# Altium PCB PCB1.PcbDoc (part 2 of 6)
Units mm, origin at the board's own origin, x right, y up, seen from the top; angles counter-clockwise.
Board outline 1473.2 x 504.06 mm, 4 copper layers (Top Layer, MidLayer1, MidLayer2, Bottom Layer); 162 components, 222 nets, 4894 pads, 2213 vias.
Unrouted connection lines stored in the file: 216.
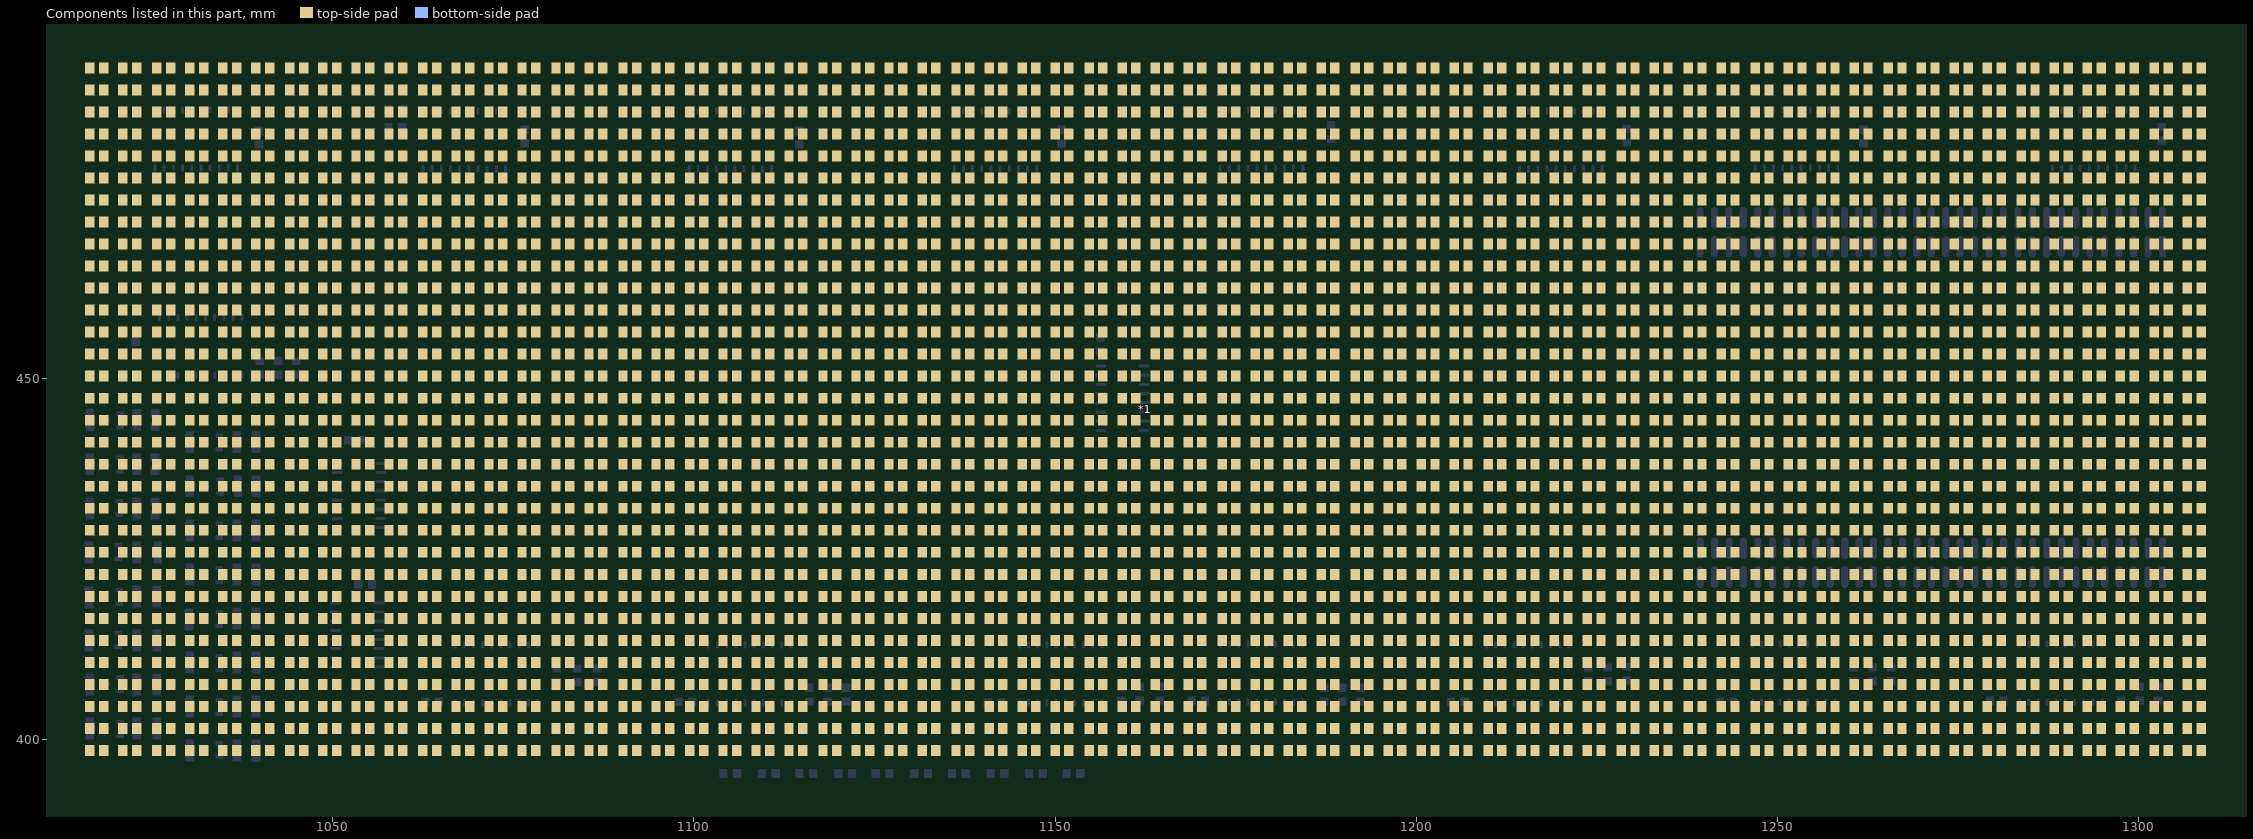
[diagram p4: the components of this part, seen from the top]

## Footprints (in the part's own frame and the unit in brackets; to place one, negate y for a bottom-side part, rotate by r counter-clockwise, add the part's x,y. Pads: shape width x height; smd on the part's side, far side on the other; paste and mask are expansions set on the pad) (continued)
LED_3264 [mm] (continued)
  rect 1.3x1.5 smd: 1(-275.082,-94.869) 1(-275.082,-91.821) 1(-275.082,-88.773) 1(-275.082,-85.725) 1(-275.082,-82.677) 1(-275.082,-79.629) 1(-275.082,-76.581) 1(-275.082,-73.533) 1(-275.082,-70.485) 1(-275.082,-67.437) 1(-275.082,-64.389) 1(-275.082,-61.341) 1(-275.082,-58.293) 1(-275.082,-55.245) 1(-275.082,-52.197) 1(-275.082,-49.149) 2(-270.51,-94.869) 2(-270.51,-91.821) 2(-270.51,-88.773) 2(-270.51,-85.725) 2(-270.51,-82.677) 2(-270.51,-79.629) 2(-270.51,-76.581) 2(-270.51,-73.533) 2(-270.51,-70.485) 2(-270.51,-67.437) 2(-270.51,-64.389) 2(-270.51,-61.341) 2(-270.51,-58.293) 2(-270.51,-55.245) 2(-270.51,-52.197) 2(-270.51,-49.149) 3(-265.811,-94.869) 3(-265.811,-91.821) 3(-265.811,-88.773) 3(-265.811,-85.725) 3(-265.811,-82.677) 3(-265.811,-79.629) 3(-265.811,-76.581) 3(-265.811,-73.533) 3(-265.811,-70.485) 3(-265.811,-67.437) 3(-265.811,-64.389) 3(-265.811,-61.341) 3(-265.811,-58.293) 3(-265.811,-55.245) 3(-265.811,-52.197) 3(-265.811,-49.149) 4(-261.239,-94.869) 4(-261.239,-91.821) 4(-261.239,-88.773) 4(-261.239,-85.725) 4(-261.239,-82.677) 4(-261.239,-79.629) 4(-261.239,-76.581) 4(-261.239,-73.533) 4(-261.239,-70.485) 4(-261.239,-67.437) 4(-261.239,-64.389) 4(-261.239,-61.341) 4(-261.239,-58.293) 4(-261.239,-55.245) 4(-261.239,-52.197) 4(-261.239,-49.149) 5(-256.667,-94.869) 5(-256.667,-91.821) 5(-256.667,-88.773) 5(-256.667,-85.725) 5(-256.667,-82.677) 5(-256.667,-79.629) 5(-256.667,-76.581) 5(-256.667,-73.533) 5(-256.667,-70.485) 5(-256.667,-67.437) 5(-256.667,-64.389) 5(-256.667,-61.341) 5(-256.667,-58.293) 5(-256.667,-55.245) 5(-256.667,-52.197) 5(-256.667,-49.149) 6(-252.095,-94.869) 6(-252.095,-91.821) 6(-252.095,-88.773) 6(-252.095,-85.725) 6(-252.095,-82.677) 6(-252.095,-79.629) 6(-252.095,-76.581) 6(-252.095,-73.533) 6(-252.095,-70.485) 6(-252.095,-67.437) 6(-252.095,-64.389) 6(-252.095,-61.341) 6(-252.095,-58.293) 6(-252.095,-55.245) 6(-252.095,-52.197) 6(-252.095,-49.149) 7(-247.396,-94.869) 7(-247.396,-91.821) 7(-247.396,-88.773) 7(-247.396,-85.725) 7(-247.396,-82.677) 7(-247.396,-79.629) 7(-247.396,-76.581) 7(-247.396,-73.533) 7(-247.396,-70.485) 7(-247.396,-67.437) 7(-247.396,-64.389) 7(-247.396,-61.341) 7(-247.396,-58.293) 7(-247.396,-55.245) 7(-247.396,-52.197) 7(-247.396,-49.149) 8(-242.824,-94.869) 8(-242.824,-91.821) 8(-242.824,-88.773) 8(-242.824,-85.725) 8(-242.824,-82.677) 8(-242.824,-79.629) 8(-242.824,-76.581) 8(-242.824,-73.533) 8(-242.824,-70.485) 8(-242.824,-67.437) 8(-242.824,-64.389) 8(-242.824,-61.341) 8(-242.824,-58.293) 8(-242.824,-55.245) 8(-242.824,-52.197) 8(-242.824,-49.149) 9(-238.252,-94.869) 9(-238.252,-91.821) 9(-238.252,-88.773) 9(-238.252,-85.725) 9(-238.252,-82.677) 9(-238.252,-79.629) 9(-238.252,-76.581) 9(-238.252,-73.533) 9(-238.252,-70.485) 9(-238.252,-67.437) 9(-238.252,-64.389) 9(-238.252,-61.341) 9(-238.252,-58.293) 9(-238.252,-55.245) 9(-238.252,-52.197) 9(-238.252,-49.149) 10(-233.68,-94.869) 10(-233.68,-91.821) 10(-233.68,-88.773) 10(-233.68,-85.725) 10(-233.68,-82.677) 10(-233.68,-79.629) 10(-233.68,-76.581) 10(-233.68,-73.533) 10(-233.68,-70.485) 10(-233.68,-67.437) 10(-233.68,-64.389) 10(-233.68,-61.341) 10(-233.68,-58.293) 10(-233.68,-55.245) 10(-233.68,-52.197) 10(-233.68,-49.149) 11(-228.981,-94.869) 11(-228.981,-91.821) 11(-228.981,-88.773) 11(-228.981,-85.725) 11(-228.981,-82.677) 11(-228.981,-79.629) 11(-228.981,-76.581) 11(-228.981,-73.533) 11(-228.981,-70.485) 11(-228.981,-67.437) 11(-228.981,-64.389) 11(-228.981,-61.341) 11(-228.981,-58.293) 11(-228.981,-55.245) 11(-228.981,-52.197) 11(-228.981,-49.149) 12(-224.409,-94.869) 12(-224.409,-91.821) 12(-224.409,-88.773) 12(-224.409,-85.725) 12(-224.409,-82.677) 12(-224.409,-79.629) 12(-224.409,-76.581) 12(-224.409,-73.533) 12(-224.409,-70.485) 12(-224.409,-67.437) 12(-224.409,-64.389) 12(-224.409,-61.341) 12(-224.409,-58.293) 12(-224.409,-55.245) 12(-224.409,-52.197) 12(-224.409,-49.149) 13(-219.837,-94.869) 13(-219.837,-91.821) 13(-219.837,-88.773) 13(-219.837,-85.725) 13(-219.837,-82.677) 13(-219.837,-79.629) 13(-219.837,-76.581) 13(-219.837,-73.533) 13(-219.837,-70.485) 13(-219.837,-67.437) 13(-219.837,-64.389) 13(-219.837,-61.341) 13(-219.837,-58.293) 13(-219.837,-55.245) 13(-219.837,-52.197) 13(-219.837,-49.149) 14(-215.265,-94.869) 14(-215.265,-91.821) 14(-215.265,-88.773) 14(-215.265,-85.725) 14(-215.265,-82.677) 14(-215.265,-79.629) 14(-215.265,-76.581) 14(-215.265,-73.533) 14(-215.265,-70.485) 14(-215.265,-67.437) 14(-215.265,-64.389) 14(-215.265,-61.341) 14(-215.265,-58.293) 14(-215.265,-55.245) 14(-215.265,-52.197) 14(-215.265,-49.149) 15(-210.566,-94.869) 15(-210.566,-91.821) 15(-210.566,-88.773) 15(-210.566,-85.725) 15(-210.566,-82.677) 15(-210.566,-79.629) 15(-210.566,-76.581) 15(-210.566,-73.533) 15(-210.566,-70.485) 15(-210.566,-67.437) 15(-210.566,-64.389) 15(-210.566,-61.341) 15(-210.566,-58.293) 15(-210.566,-55.245) 15(-210.566,-52.197) 15(-210.566,-49.149) 16(-205.994,-94.869) 16(-205.994,-91.821) 16(-205.994,-88.773) 16(-205.994,-85.725) 16(-205.994,-82.677) 16(-205.994,-79.629) 16(-205.994,-76.581) 16(-205.994,-73.533) 16(-205.994,-70.485) 16(-205.994,-67.437) 16(-205.994,-64.389) 16(-205.994,-61.341) 16(-205.994,-58.293) 16(-205.994,-55.245) 16(-205.994,-52.197) 16(-205.994,-49.149) 17(-201.295,-94.869) 17(-201.295,-91.821) 17(-201.295,-88.773) 17(-201.295,-85.725) 17(-201.295,-82.677) 17(-201.295,-79.629) 17(-201.295,-76.581) 17(-201.295,-73.533) 17(-201.295,-70.485) 17(-201.295,-67.437) 17(-201.295,-64.389) 17(-201.295,-61.341) 17(-201.295,-58.293) 17(-201.295,-55.245) 17(-201.295,-52.197) 17(-201.295,-49.149) 18(-196.723,-94.869) 18(-196.723,-91.821) 18(-196.723,-88.773) 18(-196.723,-85.725) 18(-196.723,-82.677) 18(-196.723,-79.629) 18(-196.723,-76.581) 18(-196.723,-73.533) 18(-196.723,-70.485) 18(-196.723,-67.437) 18(-196.723,-64.389) 18(-196.723,-61.341) 18(-196.723,-58.293) 18(-196.723,-55.245) 18(-196.723,-52.197) 18(-196.723,-49.149) 19(-192.024,-94.869) 19(-192.024,-91.821) 19(-192.024,-88.773) 19(-192.024,-85.725) 19(-192.024,-82.677) 19(-192.024,-79.629) 19(-192.024,-76.581) 19(-192.024,-73.533) 19(-192.024,-70.485) 19(-192.024,-67.437) 19(-192.024,-64.389) 19(-192.024,-61.341) 19(-192.024,-58.293) 19(-192.024,-55.245) 19(-192.024,-52.197) 19(-192.024,-49.149) 20(-187.452,-94.869) 20(-187.452,-91.821) 20(-187.452,-88.773) 20(-187.452,-85.725) 20(-187.452,-82.677) 20(-187.452,-79.629) 20(-187.452,-76.581) 20(-187.452,-73.533) 20(-187.452,-70.485) 20(-187.452,-67.437) 20(-187.452,-64.389) 20(-187.452,-61.341) 20(-187.452,-58.293) 20(-187.452,-55.245) 20(-187.452,-52.197) 20(-187.452,-49.149) 21(-182.88,-94.869) 21(-182.88,-91.821) 21(-182.88,-88.773) 21(-182.88,-85.725) 21(-182.88,-82.677) 21(-182.88,-79.629) 21(-182.88,-76.581) 21(-182.88,-73.533) 21(-182.88,-70.485) 21(-182.88,-67.437) 21(-182.88,-64.389) 21(-182.88,-61.341) 21(-182.88,-58.293) 21(-182.88,-55.245) 21(-182.88,-52.197) 21(-182.88,-49.149) 22(-178.308,-94.869) 22(-178.308,-91.821) 22(-178.308,-88.773) 22(-178.308,-85.725) 22(-178.308,-82.677) 22(-178.308,-79.629) 22(-178.308,-76.581) 22(-178.308,-73.533) 22(-178.308,-70.485) 22(-178.308,-67.437) 22(-178.308,-64.389) 22(-178.308,-61.341) 22(-178.308,-58.293) 22(-178.308,-55.245) 22(-178.308,-52.197) 22(-178.308,-49.149) 23(-173.609,-94.869) 23(-173.609,-91.821) 23(-173.609,-88.773) 23(-173.609,-85.725) 23(-173.609,-82.677) 23(-173.609,-79.629) 23(-173.609,-76.581) 23(-173.609,-73.533) 23(-173.609,-70.485) 23(-173.609,-67.437) 23(-173.609,-64.389) 23(-173.609,-61.341) 23(-173.609,-58.293) 23(-173.609,-55.245) 23(-173.609,-52.197) 23(-173.609,-49.149) 24(-169.037,-94.869) 24(-169.037,-91.821) 24(-169.037,-88.773) 24(-169.037,-85.725) 24(-169.037,-82.677) 24(-169.037,-79.629) 24(-169.037,-76.581) 24(-169.037,-73.533) 24(-169.037,-70.485) 24(-169.037,-67.437) 24(-169.037,-64.389) 24(-169.037,-61.341) 24(-169.037,-58.293) 24(-169.037,-55.245) 24(-169.037,-52.197) 24(-169.037,-49.149) 25(-164.465,-94.869) 25(-164.465,-91.821) 25(-164.465,-88.773) 25(-164.465,-85.725) 25(-164.465,-82.677) 25(-164.465,-79.629) 25(-164.465,-76.581) 25(-164.465,-73.533) 25(-164.465,-70.485) 25(-164.465,-67.437) 25(-164.465,-64.389) 25(-164.465,-61.341) 25(-164.465,-58.293) 25(-164.465,-55.245) 25(-164.465,-52.197) 25(-164.465,-49.149) 26(-159.893,-94.869) 26(-159.893,-91.821) 26(-159.893,-88.773) 26(-159.893,-85.725) 26(-159.893,-82.677) 26(-159.893,-79.629) 26(-159.893,-76.581) 26(-159.893,-73.533) 26(-159.893,-70.485) 26(-159.893,-67.437) 26(-159.893,-64.389) 26(-159.893,-61.341) 26(-159.893,-58.293) 26(-159.893,-55.245) 26(-159.893,-52.197) 26(-159.893,-49.149) 27(-155.194,-94.869) 27(-155.194,-91.821) 27(-155.194,-88.773) 27(-155.194,-85.725) 27(-155.194,-82.677) 27(-155.194,-79.629) 27(-155.194,-76.581) 27(-155.194,-73.533) 27(-155.194,-70.485) 27(-155.194,-67.437) 27(-155.194,-64.389) 27(-155.194,-61.341) 27(-155.194,-58.293) 27(-155.194,-55.245) 27(-155.194,-52.197) 27(-155.194,-49.149) 28(-150.622,-94.869) 28(-150.622,-91.821) 28(-150.622,-88.773) 28(-150.622,-85.725) 28(-150.622,-82.677) 28(-150.622,-79.629) 28(-150.622,-76.581) 28(-150.622,-73.533) 28(-150.622,-70.485) 28(-150.622,-67.437) 28(-150.622,-64.389) 28(-150.622,-61.341) 28(-150.622,-58.293) 28(-150.622,-55.245) 28(-150.622,-52.197) 28(-150.622,-49.149) 29(-146.05,-94.869) 29(-146.05,-91.821) 29(-146.05,-88.773) 29(-146.05,-85.725) 29(-146.05,-82.677) 29(-146.05,-79.629) 29(-146.05,-76.581) 29(-146.05,-73.533) 29(-146.05,-70.485) 29(-146.05,-67.437) 29(-146.05,-64.389) 29(-146.05,-61.341) 29(-146.05,-58.293) 29(-146.05,-55.245) 29(-146.05,-52.197) 29(-146.05,-49.149) 30(-141.478,-94.869) 30(-141.478,-91.821) 30(-141.478,-88.773) 30(-141.478,-85.725) 30(-141.478,-82.677) 30(-141.478,-79.629) 30(-141.478,-76.581) 30(-141.478,-73.533) 30(-141.478,-70.485) 30(-141.478,-67.437) 30(-141.478,-64.389) 30(-141.478,-61.341) 30(-141.478,-58.293) 30(-141.478,-55.245) 30(-141.478,-52.197) 30(-141.478,-49.149) 31(-136.779,-94.869) 31(-136.779,-91.821) 31(-136.779,-88.773) 31(-136.779,-85.725) 31(-136.779,-82.677) 31(-136.779,-79.629) 31(-136.779,-76.581) 31(-136.779,-73.533) 31(-136.779,-70.485) 31(-136.779,-67.437) 31(-136.779,-64.389) 31(-136.779,-61.341) 31(-136.779,-58.293) 31(-136.779,-55.245) 31(-136.779,-52.197) 31(-136.779,-49.149) 32(-132.207,-94.869) 32(-132.207,-91.821) 32(-132.207,-88.773) 32(-132.207,-85.725) 32(-132.207,-82.677) 32(-132.207,-79.629) 32(-132.207,-76.581) 32(-132.207,-73.533) 32(-132.207,-70.485) 32(-132.207,-67.437) 32(-132.207,-64.389) 32(-132.207,-61.341) 32(-132.207,-58.293) 32(-132.207,-55.245) 32(-132.207,-52.197) 32(-132.207,-49.149) 33(-127.635,-94.869) 33(-127.635,-91.821) 33(-127.635,-88.773) 33(-127.635,-85.725) 33(-127.635,-82.677) 33(-127.635,-79.629) 33(-127.635,-76.581) 33(-127.635,-73.533) 33(-127.635,-70.485) 33(-127.635,-67.437) 33(-127.635,-64.389) 33(-127.635,-61.341) 33(-127.635,-58.293) 33(-127.635,-55.245) 33(-127.635,-52.197) 33(-127.635,-49.149) 34(-123.063,-94.869) 34(-123.063,-91.821) 34(-123.063,-88.773) 34(-123.063,-85.725) 34(-123.063,-82.677) 34(-123.063,-79.629) 34(-123.063,-76.581) 34(-123.063,-73.533) 34(-123.063,-70.485) 34(-123.063,-67.437) 34(-123.063,-64.389) 34(-123.063,-61.341) 34(-123.063,-58.293) 34(-123.063,-55.245) 34(-123.063,-52.197) 34(-123.063,-49.149) 35(-118.364,-94.869) 35(-118.364,-91.821) 35(-118.364,-88.773) 35(-118.364,-85.725) 35(-118.364,-82.677) 35(-118.364,-79.629) 35(-118.364,-76.581) 35(-118.364,-73.533) 35(-118.364,-70.485) 35(-118.364,-67.437) 35(-118.364,-64.389) 35(-118.364,-61.341) 35(-118.364,-58.293) 35(-118.364,-55.245) 35(-118.364,-52.197) 35(-118.364,-49.149) 36(-113.792,-94.869) 36(-113.792,-91.821) 36(-113.792,-88.773) 36(-113.792,-85.725) 36(-113.792,-82.677) 36(-113.792,-79.629) 36(-113.792,-76.581) 36(-113.792,-73.533) 36(-113.792,-70.485) 36(-113.792,-67.437) 36(-113.792,-64.389) 36(-113.792,-61.341) 36(-113.792,-58.293) 36(-113.792,-55.245) 36(-113.792,-52.197) 36(-113.792,-49.149) 37(-109.22,-94.869) 37(-109.22,-91.821) 37(-109.22,-88.773) 37(-109.22,-85.725) 37(-109.22,-82.677) 37(-109.22,-79.629) 37(-109.22,-76.581) 37(-109.22,-73.533) 37(-109.22,-70.485) 37(-109.22,-67.437) 37(-109.22,-64.389) 37(-109.22,-61.341) 37(-109.22,-58.293) 37(-109.22,-55.245) 37(-109.22,-52.197) 37(-109.22,-49.149) 38(-104.648,-94.869) 38(-104.648,-91.821) 38(-104.648,-88.773) 38(-104.648,-85.725) 38(-104.648,-82.677) 38(-104.648,-79.629) 38(-104.648,-76.581) 38(-104.648,-73.533) 38(-104.648,-70.485) 38(-104.648,-67.437) 38(-104.648,-64.389) 38(-104.648,-61.341) 38(-104.648,-58.293) 38(-104.648,-55.245) 38(-104.648,-52.197) 38(-104.648,-49.149) 39(-99.949,-94.869) 39(-99.949,-91.821) 39(-99.949,-88.773) 39(-99.949,-85.725) 39(-99.949,-82.677) 39(-99.949,-79.629) 39(-99.949,-76.581) 39(-99.949,-73.533) 39(-99.949,-70.485) 39(-99.949,-67.437) 39(-99.949,-64.389) 39(-99.949,-61.341) 39(-99.949,-58.293) 39(-99.949,-55.245) 39(-99.949,-52.197) 39(-99.949,-49.149) 40(-95.377,-94.869) 40(-95.377,-91.821) 40(-95.377,-88.773) 40(-95.377,-85.725) 40(-95.377,-82.677) 40(-95.377,-79.629) 40(-95.377,-76.581) 40(-95.377,-73.533) 40(-95.377,-70.485) 40(-95.377,-67.437) 40(-95.377,-64.389) 40(-95.377,-61.341) 40(-95.377,-58.293) 40(-95.377,-55.245) 40(-95.377,-52.197) 40(-95.377,-49.149) 41(-90.805,-94.869) 41(-90.805,-91.821) 41(-90.805,-88.773) 41(-90.805,-85.725) 41(-90.805,-82.677) 41(-90.805,-79.629) 41(-90.805,-76.581) 41(-90.805,-73.533) 41(-90.805,-70.485) 41(-90.805,-67.437) 41(-90.805,-64.389) 41(-90.805,-61.341) 41(-90.805,-58.293) 41(-90.805,-55.245) 41(-90.805,-52.197) 41(-90.805,-49.149) 42(-86.233,-94.869) 42(-86.233,-91.821) 42(-86.233,-88.773) 42(-86.233,-85.725) 42(-86.233,-82.677) 42(-86.233,-79.629) 42(-86.233,-76.581) 42(-86.233,-73.533) 42(-86.233,-70.485) 42(-86.233,-67.437) 42(-86.233,-64.389) 42(-86.233,-61.341) 42(-86.233,-58.293) 42(-86.233,-55.245) 42(-86.233,-52.197) 42(-86.233,-49.149) 43(-81.534,-94.869) 43(-81.534,-91.821) 43(-81.534,-88.773) 43(-81.534,-85.725) 43(-81.534,-82.677) 43(-81.534,-79.629) 43(-81.534,-76.581) 43(-81.534,-73.533) 43(-81.534,-70.485) 43(-81.534,-67.437) 43(-81.534,-64.389) 43(-81.534,-61.341) 43(-81.534,-58.293) 43(-81.534,-55.245) 43(-81.534,-52.197) 43(-81.534,-49.149) 44(-76.962,-94.869) 44(-76.962,-91.821) 44(-76.962,-88.773) 44(-76.962,-85.725) 44(-76.962,-82.677) 44(-76.962,-79.629) 44(-76.962,-76.581) 44(-76.962,-73.533) 44(-76.962,-70.485) 44(-76.962,-67.437) 44(-76.962,-64.389) 44(-76.962,-61.341) 44(-76.962,-58.293) 44(-76.962,-55.245) 44(-76.962,-52.197) 44(-76.962,-49.149) 45(-72.39,-94.869) 45(-72.39,-91.821) 45(-72.39,-88.773) 45(-72.39,-85.725) 45(-72.39,-82.677) 45(-72.39,-79.629) 45(-72.39,-76.581) 45(-72.39,-73.533) 45(-72.39,-70.485) 45(-72.39,-67.437) 45(-72.39,-64.389) 45(-72.39,-61.341) 45(-72.39,-58.293) 45(-72.39,-55.245) 45(-72.39,-52.197) 45(-72.39,-49.149) 46(-67.818,-94.869) 46(-67.818,-91.821) 46(-67.818,-88.773) 46(-67.818,-85.725) 46(-67.818,-82.677) 46(-67.818,-79.629) 46(-67.818,-76.581) 46(-67.818,-73.533) 46(-67.818,-70.485) 46(-67.818,-67.437) 46(-67.818,-64.389) 46(-67.818,-61.341) 46(-67.818,-58.293) 46(-67.818,-55.245) 46(-67.818,-52.197) 46(-67.818,-49.149) 47(-63.119,-94.869) 47(-63.119,-91.821) 47(-63.119,-88.773) 47(-63.119,-85.725) 47(-63.119,-82.677) 47(-63.119,-79.629) 47(-63.119,-76.581) 47(-63.119,-73.533) 47(-63.119,-70.485) 47(-63.119,-67.437) 47(-63.119,-64.389) 47(-63.119,-61.341) 47(-63.119,-58.293) 47(-63.119,-55.245) 47(-63.119,-52.197) 47(-63.119,-49.149) 48(-58.547,-94.869) 48(-58.547,-91.821) 48(-58.547,-88.773) 48(-58.547,-85.725) 48(-58.547,-82.677) 48(-58.547,-79.629) 48(-58.547,-76.581) 48(-58.547,-73.533) 48(-58.547,-70.485) 48(-58.547,-67.437) 48(-58.547,-64.389) 48(-58.547,-61.341) 48(-58.547,-58.293) 48(-58.547,-55.245) 48(-58.547,-52.197) 48(-58.547,-49.149) 49(-53.848,-94.869) 49(-53.848,-91.821) 49(-53.848,-88.773) 49(-53.848,-85.725) 49(-53.848,-82.677) 49(-53.848,-79.629) 49(-53.848,-76.581) 49(-53.848,-73.533) 49(-53.848,-70.485) 49(-53.848,-67.437) 49(-53.848,-64.389) 49(-53.848,-61.341) 49(-53.848,-58.293) 49(-53.848,-55.245) 49(-53.848,-52.197) 49(-53.848,-49.149) 50(-49.276,-94.869) 50(-49.276,-91.821) 50(-49.276,-88.773) 50(-49.276,-85.725) 50(-49.276,-82.677) 50(-49.276,-79.629) 50(-49.276,-76.581) 50(-49.276,-73.533) 50(-49.276,-70.485) 50(-49.276,-67.437) 50(-49.276,-64.389) 50(-49.276,-61.341) 50(-49.276,-58.293) 50(-49.276,-55.245) 50(-49.276,-52.197) 50(-49.276,-49.149) 51(-44.577,-94.869) 51(-44.577,-91.821) 51(-44.577,-88.773) 51(-44.577,-85.725) 51(-44.577,-82.677) 51(-44.577,-79.629) 51(-44.577,-76.581) 51(-44.577,-73.533) 51(-44.577,-70.485) 51(-44.577,-67.437) 51(-44.577,-64.389) 51(-44.577,-61.341) 51(-44.577,-58.293) 51(-44.577,-55.245) 51(-44.577,-52.197) 51(-44.577,-49.149) 52(-40.005,-94.869) 52(-40.005,-91.821) 52(-40.005,-88.773) 52(-40.005,-85.725) 52(-40.005,-82.677) 52(-40.005,-79.629) 52(-40.005,-76.581) 52(-40.005,-73.533) 52(-40.005,-70.485) 52(-40.005,-67.437) 52(-40.005,-64.389) 52(-40.005,-61.341) 52(-40.005,-58.293) 52(-40.005,-55.245) 52(-40.005,-52.197) 52(-40.005,-49.149) 53(-35.433,-94.869) 53(-35.433,-91.821) 53(-35.433,-88.773) 53(-35.433,-85.725) 53(-35.433,-82.677) 53(-35.433,-79.629) 53(-35.433,-76.581) 53(-35.433,-73.533) 53(-35.433,-70.485) 53(-35.433,-67.437) 53(-35.433,-64.389) 53(-35.433,-61.341) 53(-35.433,-58.293) 53(-35.433,-55.245) 53(-35.433,-52.197) 53(-35.433,-49.149) 54(-30.861,-94.869) 54(-30.861,-91.821) 54(-30.861,-88.773) 54(-30.861,-85.725) 54(-30.861,-82.677) 54(-30.861,-79.629) 54(-30.861,-76.581) 54(-30.861,-73.533) 54(-30.861,-70.485) 54(-30.861,-67.437) 54(-30.861,-64.389) 54(-30.861,-61.341) 54(-30.861,-58.293) 54(-30.861,-55.245) 54(-30.861,-52.197) 54(-30.861,-49.149) 55(-26.162,-94.869) 55(-26.162,-91.821) 55(-26.162,-88.773) 55(-26.162,-85.725) 55(-26.162,-82.677) 55(-26.162,-79.629) 55(-26.162,-76.581) 55(-26.162,-73.533) 55(-26.162,-70.485) 55(-26.162,-67.437) 55(-26.162,-64.389) 55(-26.162,-61.341) 55(-26.162,-58.293) 55(-26.162,-55.245) 55(-26.162,-52.197) 55(-26.162,-49.149) 56(-21.59,-94.869) 56(-21.59,-91.821) 56(-21.59,-88.773) 56(-21.59,-85.725) 56(-21.59,-82.677) 56(-21.59,-79.629) 56(-21.59,-76.581) 56(-21.59,-73.533) 56(-21.59,-70.485) 56(-21.59,-67.437) 56(-21.59,-64.389) 56(-21.59,-61.341) 56(-21.59,-58.293) 56(-21.59,-55.245) 56(-21.59,-52.197) 56(-21.59,-49.149) 57(-17.018,-94.869) 57(-17.018,-91.821) 57(-17.018,-88.773) 57(-17.018,-85.725) 57(-17.018,-82.677) 57(-17.018,-79.629) 57(-17.018,-76.581) 57(-17.018,-73.533) 57(-17.018,-70.485) 57(-17.018,-67.437) 57(-17.018,-64.389) 57(-17.018,-61.341) 57(-17.018,-58.293) 57(-17.018,-55.245) 57(-17.018,-52.197) 57(-17.018,-49.149) 58(-12.446,-94.869) 58(-12.446,-91.821) 58(-12.446,-88.773) 58(-12.446,-85.725) 58(-12.446,-82.677) 58(-12.446,-79.629) 58(-12.446,-76.581) 58(-12.446,-73.533) 58(-12.446,-70.485) 58(-12.446,-67.437) 58(-12.446,-64.389) 58(-12.446,-61.341) 58(-12.446,-58.293) 58(-12.446,-55.245) 58(-12.446,-52.197) 58(-12.446,-49.149) 59(-7.747,-94.869) 59(-7.747,-91.821) 59(-7.747,-88.773) 59(-7.747,-85.725) 59(-7.747,-82.677) 59(-7.747,-79.629) 59(-7.747,-76.581) 59(-7.747,-73.533) 59(-7.747,-70.485) 59(-7.747,-67.437) 59(-7.747,-64.389) 59(-7.747,-61.341) 59(-7.747,-58.293) 59(-7.747,-55.245) 59(-7.747,-52.197) 59(-7.747,-49.149) 60(-3.175,-94.869) 60(-3.175,-91.821) 60(-3.175,-88.773) 60(-3.175,-85.725) 60(-3.175,-82.677) 60(-3.175,-79.629) 60(-3.175,-76.581) 60(-3.175,-73.533) 60(-3.175,-70.485) 60(-3.175,-67.437) 60(-3.175,-64.389) 60(-3.175,-61.341) 60(-3.175,-58.293) 60(-3.175,-55.245) 60(-3.175,-52.197) 60(-3.175,-49.149) 61(1.397,-94.869) 61(1.397,-91.821) 61(1.397,-88.773) 61(1.397,-85.725) 61(1.397,-82.677) 61(1.397,-79.629) 61(1.397,-76.581) 61(1.397,-73.533) 61(1.397,-70.485) 61(1.397,-67.437) 61(1.397,-64.389) 61(1.397,-61.341) 61(1.397,-58.293) 61(1.397,-55.245) 61(1.397,-52.197) 61(1.397,-49.149) 62(5.969,-94.869) 62(5.969,-91.821) 62(5.969,-88.773) 62(5.969,-85.725) 62(5.969,-82.677) 62(5.969,-79.629) 62(5.969,-76.581) 62(5.969,-73.533) 62(5.969,-70.485) 62(5.969,-67.437) 62(5.969,-64.389) 62(5.969,-61.341) 62(5.969,-58.293) 62(5.969,-55.245) 62(5.969,-52.197) 62(5.969,-49.149) 63(10.668,-94.869) 63(10.668,-91.821) 63(10.668,-88.773) 63(10.668,-85.725) 63(10.668,-82.677) 63(10.668,-79.629) 63(10.668,-76.581) 63(10.668,-73.533) 63(10.668,-70.485) 63(10.668,-67.437) 63(10.668,-64.389) 63(10.668,-61.341) 63(10.668,-58.293) 63(10.668,-55.245) 63(10.668,-52.197) 63(10.668,-49.149) 64(15.24,-94.869) 64(15.24,-91.821) 64(15.24,-88.773) 64(15.24,-85.725) 64(15.24,-82.677) 64(15.24,-79.629) 64(15.24,-76.581) 64(15.24,-73.533) 64(15.24,-70.485) 64(15.24,-67.437) 64(15.24,-64.389) 64(15.24,-61.341) 64(15.24,-58.293) 64(15.24,-55.245) 64(15.24,-52.197) 64(15.24,-49.149) 65(-273.182,-94.869) 65(-273.182,-46.101) 65(-268.61,-94.869) 65(-268.61,-46.101) 65(-263.911,-94.869) 65(-263.911,-46.101) 65(-259.339,-94.869) 65(-259.339,-46.101) 65(-254.767,-94.869) 65(-254.767,-46.101) 65(-250.195,-94.869) 65(-250.195,-46.101) 65(-245.496,-94.869) 65(-245.496,-46.101) 65(-240.924,-94.869) 65(-240.924,-46.101) 65(-236.352,-94.869) 65(-236.352,-46.101) 65(-231.78,-94.869) 65(-231.78,-46.101) 65(-227.081,-94.869) 65(-227.081,-46.101) 65(-222.509,-94.869) 65(-222.509,-46.101) 65(-217.937,-94.869) 65(-217.937,-46.101) 65(-213.365,-94.869) 65(-213.365,-46.101) 65(-208.666,-94.869) 65(-208.666,-46.101) 65(-204.094,-94.869) 65(-204.094,-46.101) 65(-199.395,-94.869) 65(-199.395,-46.101) 65(-194.823,-94.869) 65(-194.823,-46.101) 65(-190.124,-94.869) 65(-190.124,-46.101) 65(-185.552,-94.869) 65(-185.552,-46.101) 65(-180.98,-94.869) 65(-180.98,-46.101) 65(-176.408,-94.869) 65(-176.408,-46.101) 65(-171.709,-94.869) 65(-171.709,-46.101) 65(-167.137,-94.869) 65(-167.137,-46.101) 65(-162.565,-94.869) 65(-162.565,-46.101) 65(-157.993,-94.869) 65(-157.993,-46.101) 65(-153.294,-94.869) 65(-153.294,-46.101) 65(-148.722,-94.869) 65(-148.722,-46.101) 65(-144.15,-94.869) 65(-144.15,-46.101) 65(-139.578,-94.869) 65(-139.578,-46.101) 65(-134.879,-94.869) 65(-134.879,-46.101) 65(-130.307,-94.869) 65(-130.307,-46.101) 65(-125.735,-94.869) 65(-125.735,-46.101) 65(-121.163,-94.869) 65(-121.163,-46.101) 65(-116.464,-94.869) 65(-116.464,-46.101) 65(-111.892,-94.869) 65(-111.892,-46.101) 65(-107.32,-94.869) 65(-107.32,-46.101) 65(-102.748,-94.869) 65(-102.748,-46.101) 65(-98.049,-94.869) 65(-98.049,-46.101) 65(-93.477,-94.869) 65(-93.477,-46.101) 65(-88.905,-94.869) 65(-88.905,-46.101) 65(-84.333,-94.869) 65(-84.333,-46.101) 65(-79.634,-94.869) 65(-79.634,-46.101) 65(-75.062,-94.869) 65(-75.062,-46.101) 65(-70.49,-94.869) 65(-70.49,-46.101) 65(-65.918,-94.869) 65(-65.918,-46.101) 65(-61.219,-94.869) 65(-61.219,-46.101) 65(-56.647,-94.869) 65(-56.647,-46.101) 65(-51.948,-94.869) 65(-51.948,-46.101) 65(-47.376,-94.869) 65(-47.376,-46.101) 65(-42.677,-94.869) 65(-42.677,-46.101) 65(-38.105,-94.869) 65(-38.105,-46.101) 65(-33.533,-94.869) 65(-33.533,-46.101) 65(-28.961,-94.869) 65(-28.961,-46.101) 65(-24.262,-94.869) 65(-24.262,-46.101) 65(-19.69,-94.869) 65(-19.69,-46.101) 65(-15.118,-94.869) 65(-15.118,-46.101) 65(-10.546,-94.869) 65(-10.546,-46.101) 65(-5.847,-94.869) 65(-5.847,-46.101) 65(-1.275,-94.869) 65(-1.275,-46.101) 65(3.297,-94.869) 65(3.297,-46.101) 65(7.869,-94.869) 65(7.869,-46.101) 65(12.568,-94.869) 65(12.568,-46.101) 65(17.14,-94.869) 65(17.14,-46.101) 66(-273.182,-91.821) 66(-273.182,-43.053) 66(-268.61,-91.821) 66(-268.61,-43.053) 66(-263.911,-91.821) 66(-263.911,-43.053) 66(-259.339,-91.821) 66(-259.339,-43.053) 66(-254.767,-91.821) 66(-254.767,-43.053) 66(-250.195,-91.821) 66(-250.195,-43.053) 66(-245.496,-91.821) 66(-245.496,-43.053) 66(-240.924,-91.821) 66(-240.924,-43.053) 66(-236.352,-91.821) 66(-236.352,-43.053) 66(-231.78,-91.821) 66(-231.78,-43.053) 66(-227.081,-91.821) 66(-227.081,-43.053) 66(-222.509,-91.821) 66(-222.509,-43.053) 66(-217.937,-91.821) 66(-217.937,-43.053) 66(-213.365,-91.821) 66(-213.365,-43.053) 66(-208.666,-91.821) 66(-208.666,-43.053) 66(-204.094,-91.821) 66(-204.094,-43.053) 66(-199.395,-91.821) 66(-199.395,-43.053) 66(-194.823,-91.821) 66(-194.823,-43.053) 66(-190.124,-91.821) 66(-190.124,-43.053) 66(-185.552,-91.821) 66(-185.552,-43.053) 66(-180.98,-91.821) 66(-180.98,-43.053) 66(-176.408,-91.821) 66(-176.408,-43.053) 66(-171.709,-91.821) 66(-171.709,-43.053) 66(-167.137,-91.821) 66(-167.137,-43.053) 66(-162.565,-91.821) 66(-162.565,-43.053) 66(-157.993,-91.821) 66(-157.993,-43.053) 66(-153.294,-91.821) 66(-153.294,-43.053) 66(-148.722,-91.821) 66(-148.722,-43.053) 66(-144.15,-91.821) 66(-144.15,-43.053) 66(-139.578,-91.821) 66(-139.578,-43.053) 66(-134.879,-91.821) 66(-134.879,-43.053) 66(-130.307,-91.821) 66(-130.307,-43.053) 66(-125.735,-91.821) 66(-125.735,-43.053) 66(-121.163,-91.821) 66(-121.163,-43.053) 66(-116.464,-91.821) 66(-116.464,-43.053) 66(-111.892,-91.821) 66(-111.892,-43.053) 66(-107.32,-91.821) 66(-107.32,-43.053) 66(-102.748,-91.821) 66(-102.748,-43.053) 66(-98.049,-91.821) 66(-98.049,-43.053) 66(-93.477,-91.821) 66(-93.477,-43.053) 66(-88.905,-91.821) 66(-88.905,-43.053) 66(-84.333,-91.821) 66(-84.333,-43.053) 66(-79.634,-91.821) 66(-79.634,-43.053) 66(-75.062,-91.821) 66(-75.062,-43.053) 66(-70.49,-91.821) 66(-70.49,-43.053) 66(-65.918,-91.821) 66(-65.918,-43.053) 66(-61.219,-91.821) 66(-61.219,-43.053) 66(-56.647,-91.821) 66(-56.647,-43.053) 66(-51.948,-91.821) 66(-51.948,-43.053) 66(-47.376,-91.821) 66(-47.376,-43.053) 66(-42.677,-91.821) 66(-42.677,-43.053) 66(-38.105,-91.821) 66(-38.105,-43.053) 66(-33.533,-91.821) 66(-33.533,-43.053) 66(-28.961,-91.821) 66(-28.961,-43.053) 66(-24.262,-91.821) 66(-24.262,-43.053) 66(-19.69,-91.821) 66(-19.69,-43.053) 66(-15.118,-91.821) 66(-15.118,-43.053) 66(-10.546,-91.821) 66(-10.546,-43.053) 66(-5.847,-91.821) 66(-5.847,-43.053) 66(-1.275,-91.821) 66(-1.275,-43.053) 66(3.297,-91.821) 66(3.297,-43.053) 66(7.869,-91.821) 66(7.869,-43.053) 66(12.568,-91.821) 66(12.568,-43.053) 66(17.14,-91.821) 66(17.14,-43.053) 67(-273.182,-88.773) 67(-273.182,-40.005) 67(-268.61,-88.773) 67(-268.61,-40.005) 67(-263.911,-88.773) 67(-263.911,-40.005) 67(-259.339,-88.773) 67(-259.339,-40.005) 67(-254.767,-88.773) 67(-254.767,-40.005) 67(-250.195,-88.773) 67(-250.195,-40.005) 67(-245.496,-88.773) 67(-245.496,-40.005) 67(-240.924,-88.773) 67(-240.924,-40.005) 67(-236.352,-88.773) 67(-236.352,-40.005) 67(-231.78,-88.773) 67(-231.78,-40.005) 67(-227.081,-88.773) 67(-227.081,-40.005) 67(-222.509,-88.773) 67(-222.509,-40.005) 67(-217.937,-88.773) 67(-217.937,-40.005) 67(-213.365,-88.773) 67(-213.365,-40.005) 67(-208.666,-88.773) 67(-208.666,-40.005) 67(-204.094,-88.773) 67(-204.094,-40.005) 67(-199.395,-88.773) 67(-199.395,-40.005) 67(-194.823,-88.773) 67(-194.823,-40.005) 67(-190.124,-88.773) 67(-190.124,-40.005) 67(-185.552,-88.773) 67(-185.552,-40.005) 67(-180.98,-88.773) 67(-180.98,-40.005) 67(-176.408,-88.773) 67(-176.408,-40.005) 67(-171.709,-88.773) 67(-171.709,-40.005) 67(-167.137,-88.773) 67(-167.137,-40.005) 67(-162.565,-88.773) 67(-162.565,-40.005) 67(-157.993,-88.773) 67(-157.993,-40.005) 67(-153.294,-88.773) 67(-153.294,-40.005) 67(-148.722,-88.773) 67(-148.722,-40.005) 67(-144.15,-88.773) 67(-144.15,-40.005) 67(-139.578,-88.773) 67(-139.578,-40.005) 67(-134.879,-88.773) 67(-134.879,-40.005) 67(-130.307,-88.773) 67(-130.307,-40.005) 67(-125.735,-88.773) 67(-125.735,-40.005) 67(-121.163,-88.773) 67(-121.163,-40.005) 67(-116.464,-88.773) 67(-116.464,-40.005) 67(-111.892,-88.773) 67(-111.892,-40.005) 67(-107.32,-88.773) 67(-107.32,-40.005) 67(-102.748,-88.773) 67(-102.748,-40.005) 67(-98.049,-88.773) 67(-98.049,-40.005) 67(-93.477,-88.773) 67(-93.477,-40.005) 67(-88.905,-88.773) 67(-88.905,-40.005) 67(-84.333,-88.773) 67(-84.333,-40.005) 67(-79.634,-88.773) 67(-79.634,-40.005) 67(-75.062,-88.773) 67(-75.062,-40.005) 67(-70.49,-88.773) 67(-70.49,-40.005) 67(-65.918,-88.773) 67(-65.918,-40.005) 67(-61.219,-88.773) 67(-61.219,-40.005) 67(-56.647,-88.773) 67(-56.647,-40.005) 67(-51.948,-88.773) 67(-51.948,-40.005) 67(-47.376,-88.773) 67(-47.376,-40.005) 67(-42.677,-88.773) 67(-42.677,-40.005) 67(-38.105,-88.773) 67(-38.105,-40.005) 67(-33.533,-88.773) 67(-33.533,-40.005) 67(-28.961,-88.773) 67(-28.961,-40.005) 67(-24.262,-88.773) 67(-24.262,-40.005) 67(-19.69,-88.773) 67(-19.69,-40.005) 67(-15.118,-88.773) 67(-15.118,-40.005) 67(-10.546,-88.773) 67(-10.546,-40.005) 67(-5.847,-88.773) 67(-5.847,-40.005) 67(-1.275,-88.773) 67(-1.275,-40.005) 67(3.297,-88.773) 67(3.297,-40.005) 67(7.869,-88.773) 67(7.869,-40.005) 67(12.568,-88.773) 67(12.568,-40.005) 67(17.14,-88.773) 67(17.14,-40.005) 68(-273.182,-85.725) 68(-273.182,-36.957) 68(-268.61,-85.725) 68(-268.61,-36.957) 68(-263.911,-85.725) 68(-263.911,-36.957) 68(-259.339,-85.725) 68(-259.339,-36.957) 68(-254.767,-85.725) 68(-254.767,-36.957) 68(-250.195,-85.725) 68(-250.195,-36.957) 68(-245.496,-85.725) 68(-245.496,-36.957) 68(-240.924,-85.725) 68(-240.924,-36.957) 68(-236.352,-85.725) 68(-236.352,-36.957) 68(-231.78,-85.725) 68(-231.78,-36.957) 68(-227.081,-85.725) 68(-227.081,-36.957) 68(-222.509,-85.725) 68(-222.509,-36.957) 68(-217.937,-85.725) 68(-217.937,-36.957) 68(-213.365,-85.725) 68(-213.365,-36.957) 68(-208.666,-85.725) 68(-208.666,-36.957) 68(-204.094,-85.725) 68(-204.094,-36.957) 68(-199.395,-85.725) 68(-199.395,-36.957) 68(-194.823,-85.725) 68(-194.823,-36.957) 68(-190.124,-85.725) 68(-190.124,-36.957) 68(-185.552,-85.725) 68(-185.552,-36.957) 68(-180.98,-85.725) 68(-180.98,-36.957) 68(-176.408,-85.725) 68(-176.408,-36.957) 68(-171.709,-85.725) 68(-171.709,-36.957) 68(-167.137,-85.725) 68(-167.137,-36.957) 68(-162.565,-85.725) 68(-162.565,-36.957) 68(-157.993,-85.725) 68(-157.993,-36.957) 68(-153.294,-85.725) 68(-153.294,-36.957) 68(-148.722,-85.725) 68(-148.722,-36.957) 68(-144.15,-85.725) 68(-144.15,-36.957) 68(-139.578,-85.725) 68(-139.578,-36.957) 68(-134.879,-85.725) 68(-134.879,-36.957) 68(-130.307,-85.725) 68(-130.307,-36.957) 68(-125.735,-85.725) 68(-125.735,-36.957) 68(-121.163,-85.725) 68(-121.163,-36.957) 68(-116.464,-85.725) 68(-116.464,-36.957) 68(-111.892,-85.725) 68(-111.892,-36.957) 68(-107.32,-85.725) 68(-107.32,-36.957) 68(-102.748,-85.725) 68(-102.748,-36.957) 68(-98.049,-85.725) 68(-98.049,-36.957) 68(-93.477,-85.725) 68(-93.477,-36.957) 68(-88.905,-85.725) 68(-88.905,-36.957) 68(-84.333,-85.725) 68(-84.333,-36.957) 68(-79.634,-85.725) 68(-79.634,-36.957) 68(-75.062,-85.725) 68(-75.062,-36.957) 68(-70.49,-85.725) 68(-70.49,-36.957) 68(-65.918,-85.725) 68(-65.918,-36.957) 68(-61.219,-85.725) 68(-61.219,-36.957) 68(-56.647,-85.725) 68(-56.647,-36.957) 68(-51.948,-85.725) 68(-51.948,-36.957) 68(-47.376,-85.725) 68(-47.376,-36.957) 68(-42.677,-85.725) 68(-42.677,-36.957) 68(-38.105,-85.725) 68(-38.105,-36.957) 68(-33.533,-85.725) 68(-33.533,-36.957) 68(-28.961,-85.725) 68(-28.961,-36.957) 68(-24.262,-85.725) 68(-24.262,-36.957) 68(-19.69,-85.725) 68(-19.69,-36.957) 68(-15.118,-85.725) 68(-15.118,-36.957) 68(-10.546,-85.725) 68(-10.546,-36.957) 68(-5.847,-85.725) 68(-5.847,-36.957) 68(-1.275,-85.725) 68(-1.275,-36.957) 68(3.297,-85.725) 68(3.297,-36.957) 68(7.869,-85.725) 68(7.869,-36.957) 68(12.568,-85.725) 68(12.568,-36.957) 68(17.14,-85.725) 68(17.14,-36.957) 69(-273.182,-82.677) 69(-273.182,-33.909) 69(-268.61,-82.677) 69(-268.61,-33.909) 69(-263.911,-82.677) 69(-263.911,-33.909) 69(-259.339,-82.677) 69(-259.339,-33.909) 69(-254.767,-82.677) 69(-254.767,-33.909) 69(-250.195,-82.677) 69(-250.195,-33.909) 69(-245.496,-82.677) 69(-245.496,-33.909) 69(-240.924,-82.677) 69(-240.924,-33.909) 69(-236.352,-82.677) 69(-236.352,-33.909) 69(-231.78,-82.677) 69(-231.78,-33.909) 69(-227.081,-82.677) 69(-227.081,-33.909) 69(-222.509,-82.677) 69(-222.509,-33.909) 69(-217.937,-82.677) 69(-217.937,-33.909) 69(-213.365,-82.677) 69(-213.365,-33.909) 69(-208.666,-82.677) 69(-208.666,-33.909) 69(-204.094,-82.677) 69(-204.094,-33.909) 69(-199.395,-82.677) 69(-199.395,-33.909) 69(-194.823,-82.677) 69(-194.823,-33.909) 69(-190.124,-82.677) 69(-190.124,-33.909) 69(-185.552,-82.677) 69(-185.552,-33.909) 69(-180.98,-82.677) 69(-180.98,-33.909) 69(-176.408,-82.677) 69(-176.408,-33.909) 69(-171.709,-82.677) 69(-171.709,-33.909) 69(-167.137,-82.677) 69(-167.137,-33.909) 69(-162.565,-82.677) 69(-162.565,-33.909) 69(-157.993,-82.677) 69(-157.993,-33.909) 69(-153.294,-82.677) 69(-153.294,-33.909) 69(-148.722,-82.677) 69(-148.722,-33.909) 69(-144.15,-82.677) 69(-144.15,-33.909) 69(-139.578,-82.677) 69(-139.578,-33.909) 69(-134.879,-82.677) 69(-134.879,-33.909) 69(-130.307,-82.677) 69(-130.307,-33.909) 69(-125.735,-82.677) 69(-125.735,-33.909) 69(-121.163,-82.677) 69(-121.163,-33.909) 69(-116.464,-82.677) 69(-116.464,-33.909) 69(-111.892,-82.677) 69(-111.892,-33.909) 69(-107.32,-82.677) 69(-107.32,-33.909) 69(-102.748,-82.677) 69(-102.748,-33.909) 69(-98.049,-82.677) 69(-98.049,-33.909) 69(-93.477,-82.677) 69(-93.477,-33.909) 69(-88.905,-82.677) 69(-88.905,-33.909) 69(-84.333,-82.677) 69(-84.333,-33.909) 69(-79.634,-82.677) 69(-79.634,-33.909) 69(-75.062,-82.677) 69(-75.062,-33.909) 69(-70.49,-82.677) 69(-70.49,-33.909) 69(-65.918,-82.677) 69(-65.918,-33.909) 69(-61.219,-82.677) 69(-61.219,-33.909) 69(-56.647,-82.677) 69(-56.647,-33.909) 69(-51.948,-82.677) 69(-51.948,-33.909) 69(-47.376,-82.677) 69(-47.376,-33.909) 69(-42.677,-82.677) 69(-42.677,-33.909) 69(-38.105,-82.677) 69(-38.105,-33.909) 69(-33.533,-82.677) 69(-33.533,-33.909) 69(-28.961,-82.677) 69(-28.961,-33.909) 69(-24.262,-82.677) 69(-24.262,-33.909) 69(-19.69,-82.677) 69(-19.69,-33.909) 69(-15.118,-82.677) 69(-15.118,-33.909) 69(-10.546,-82.677) 69(-10.546,-33.909) 69(-5.847,-82.677) 69(-5.847,-33.909) 69(-1.275,-82.677) 69(-1.275,-33.909) 69(3.297,-82.677) 69(3.297,-33.909) 69(7.869,-82.677) 69(7.869,-33.909) 69(12.568,-82.677) 69(12.568,-33.909) 69(17.14,-82.677) 69(17.14,-33.909) 70(-273.182,-79.629) 70(-273.182,-30.861) 70(-268.61,-79.629) 70(-268.61,-30.861) 70(-263.911,-79.629) 70(-263.911,-30.861) 70(-259.339,-79.629) 70(-259.339,-30.861) 70(-254.767,-79.629) 70(-254.767,-30.861) 70(-250.195,-79.629) 70(-250.195,-30.861) 70(-245.496,-79.629) 70(-245.496,-30.861) 70(-240.924,-79.629) 70(-240.924,-30.861) 70(-236.352,-79.629) 70(-236.352,-30.861) 70(-231.78,-79.629) 70(-231.78,-30.861) 70(-227.081,-79.629) 70(-227.081,-30.861) 70(-222.509,-79.629) 70(-222.509,-30.861) 70(-217.937,-79.629) 70(-217.937,-30.861) 70(-213.365,-79.629) 70(-213.365,-30.861) 70(-208.666,-79.629) 70(-208.666,-30.861) 70(-204.094,-79.629) 70(-204.094,-30.861) 70(-199.395,-79.629) 70(-199.395,-30.861) 70(-194.823,-79.629) 70(-194.823,-30.861) 70(-190.124,-79.629) 70(-190.124,-30.861) 70(-185.552,-79.629) 70(-185.552,-30.861) 70(-180.98,-79.629) 70(-180.98,-30.861) 70(-176.408,-79.629) 70(-176.408,-30.861) 70(-171.709,-79.629) 70(-171.709,-30.861) 70(-167.137,-79.629) 70(-167.137,-30.861) 70(-162.565,-79.629) 70(-162.565,-30.861) 70(-157.993,-79.629) 70(-157.993,-30.861) 70(-153.294,-79.629) 70(-153.294,-30.861) 70(-148.722,-79.629) 70(-148.722,-30.861) 70(-144.15,-79.629) 70(-144.15,-30.861) 70(-139.578,-79.629) 70(-139.578,-30.861) 70(-134.879,-79.629) 70(-134.879,-30.861) 70(-130.307,-79.629) 70(-130.307,-30.861) 70(-125.735,-79.629) 70(-125.735,-30.861) 70(-121.163,-79.629) 70(-121.163,-30.861) 70(-116.464,-79.629) 70(-116.464,-30.861) 70(-111.892,-79.629) 70(-111.892,-30.861) 70(-107.32,-79.629) 70(-107.32,-30.861) 70(-102.748,-79.629) 70(-102.748,-30.861) 70(-98.049,-79.629) 70(-98.049,-30.861) 70(-93.477,-79.629) 70(-93.477,-30.861) 70(-88.905,-79.629) 70(-88.905,-30.861) 70(-84.333,-79.629) 70(-84.333,-30.861) 70(-79.634,-79.629) 70(-79.634,-30.861) 70(-75.062,-79.629) 70(-75.062,-30.861) 70(-70.49,-79.629) 70(-70.49,-30.861) 70(-65.918,-79.629) 70(-65.918,-30.861) 70(-61.219,-79.629) 70(-61.219,-30.861) 70(-56.647,-79.629) 70(-56.647,-30.861) 70(-51.948,-79.629) 70(-51.948,-30.861) 70(-47.376,-79.629) 70(-47.376,-30.861) 70(-42.677,-79.629) 70(-42.677,-30.861) 70(-38.105,-79.629) 70(-38.105,-30.861) 70(-33.533,-79.629) 70(-33.533,-30.861) 70(-28.961,-79.629) 70(-28.961,-30.861) 70(-24.262,-79.629) 70(-24.262,-30.861) 70(-19.69,-79.629) 70(-19.69,-30.861) 70(-15.118,-79.629) 70(-15.118,-30.861) 70(-10.546,-79.629) 70(-10.546,-30.861) 70(-5.847,-79.629) 70(-5.847,-30.861) 70(-1.275,-79.629) 70(-1.275,-30.861) 70(3.297,-79.629) 70(3.297,-30.861) 70(7.869,-79.629) 70(7.869,-30.861) 70(12.568,-79.629) 70(12.568,-30.861) 70(17.14,-79.629) 70(17.14,-30.861) 71(-273.182,-76.581) 71(-273.182,-27.813) 71(-268.61,-76.581) 71(-268.61,-27.813) 71(-263.911,-76.581) 71(-263.911,-27.813) 71(-259.339,-76.581) 71(-259.339,-27.813) 71(-254.767,-76.581) 71(-254.767,-27.813) 71(-250.195,-76.581) 71(-250.195,-27.813) 71(-245.496,-76.581) 71(-245.496,-27.813) 71(-240.924,-76.581) 71(-240.924,-27.813) 71(-236.352,-76.581) 71(-236.352,-27.813) 71(-231.78,-76.581) 71(-231.78,-27.813) 71(-227.081,-76.581) 71(-227.081,-27.813) 71(-222.509,-76.581) 71(-222.509,-27.813) 71(-217.937,-76.581) 71(-217.937,-27.813) 71(-213.365,-76.581) 71(-213.365,-27.813) 71(-208.666,-76.581) 71(-208.666,-27.813) 71(-204.094,-76.581) 71(-204.094,-27.813) 71(-199.395,-76.581) 71(-199.395,-27.813) 71(-194.823,-76.581) 71(-194.823,-27.813) 71(-190.124,-76.581) 71(-190.124,-27.813) 71(-185.552,-76.581) 71(-185.552,-27.813) 71(-180.98,-76.581) 71(-180.98,-27.813) 71(-176.408,-76.581) 71(-176.408,-27.813) 71(-171.709,-76.581) 71(-171.709,-27.813) 71(-167.137,-76.581) 71(-167.137,-27.813) 71(-162.565,-76.581) 71(-162.565,-27.813) 71(-157.993,-76.581) 71(-157.993,-27.813) 71(-153.294,-76.581) 71(-153.294,-27.813) 71(-148.722,-76.581) 71(-148.722,-27.813) 71(-144.15,-76.581) 71(-144.15,-27.813) 71(-139.578,-76.581) 71(-139.578,-27.813) 71(-134.879,-76.581) 71(-134.879,-27.813) 71(-130.307,-76.581) 71(-130.307,-27.813) 71(-125.735,-76.581) 71(-125.735,-27.813) 71(-121.163,-76.581) 71(-121.163,-27.813) 71(-116.464,-76.581) 71(-116.464,-27.813) 71(-111.892,-76.581) 71(-111.892,-27.813) 71(-107.32,-76.581) 71(-107.32,-27.813) 71(-102.748,-76.581) 71(-102.748,-27.813) 71(-98.049,-76.581) 71(-98.049,-27.813) 71(-93.477,-76.581) 71(-93.477,-27.813) 71(-88.905,-76.581) 71(-88.905,-27.813) 71(-84.333,-76.581) 71(-84.333,-27.813) 71(-79.634,-76.581) 71(-79.634,-27.813) 71(-75.062,-76.581) 71(-75.062,-27.813) 71(-70.49,-76.581) 71(-70.49,-27.813) 71(-65.918,-76.581) 71(-65.918,-27.813) 71(-61.219,-76.581) 71(-61.219,-27.813) 71(-56.647,-76.581) 71(-56.647,-27.813) 71(-51.948,-76.581) 71(-51.948,-27.813) 71(-47.376,-76.581) 71(-47.376,-27.813) 71(-42.677,-76.581) 71(-42.677,-27.813) 71(-38.105,-76.581) 71(-38.105,-27.813) 71(-33.533,-76.581) 71(-33.533,-27.813) 71(-28.961,-76.581) 71(-28.961,-27.813) 71(-24.262,-76.581) 71(-24.262,-27.813) 71(-19.69,-76.581) 71(-19.69,-27.813) 71(-15.118,-76.581) 71(-15.118,-27.813) 71(-10.546,-76.581) 71(-10.546,-27.813) 71(-5.847,-76.581) 71(-5.847,-27.813) 71(-1.275,-76.581) 71(-1.275,-27.813) 71(3.297,-76.581) 71(3.297,-27.813) 71(7.869,-76.581) 71(7.869,-27.813) 71(12.568,-76.581) 71(12.568,-27.813) 71(17.14,-76.581) 71(17.14,-27.813) 72(-273.182,-73.533) 72(-273.182,-24.765) 72(-268.61,-73.533) 72(-268.61,-24.765) 72(-263.911,-73.533) 72(-263.911,-24.765) 72(-259.339,-73.533) 72(-259.339,-24.765) 72(-254.767,-73.533) 72(-254.767,-24.765) 72(-250.195,-73.533) 72(-250.195,-24.765) 72(-245.496,-73.533) 72(-245.496,-24.765) 72(-240.924,-73.533) 72(-240.924,-24.765) 72(-236.352,-73.533) 72(-236.352,-24.765) 72(-231.78,-73.533) 72(-231.78,-24.765) 72(-227.081,-73.533) 72(-227.081,-24.765) 72(-222.509,-73.533) 72(-222.509,-24.765) 72(-217.937,-73.533) 72(-217.937,-24.765) 72(-213.365,-73.533) 72(-213.365,-24.765) 72(-208.666,-73.533) 72(-208.666,-24.765) 72(-204.094,-73.533) 72(-204.094,-24.765) 72(-199.395,-73.533) 72(-199.395,-24.765) 72(-194.823,-73.533) 72(-194.823,-24.765) 72(-190.124,-73.533) 72(-190.124,-24.765) 72(-185.552,-73.533) 72(-185.552,-24.765) 72(-180.98,-73.533) 72(-180.98,-24.765) 72(-176.408,-73.533) 72(-176.408,-24.765) 72(-171.709,-73.533) 72(-171.709,-24.765) 72(-167.137,-73.533) 72(-167.137,-24.765) 72(-162.565,-73.533) 72(-162.565,-24.765) 72(-157.993,-73.533) 72(-157.993,-24.765) 72(-153.294,-73.533) 72(-153.294,-24.765) 72(-148.722,-73.533) 72(-148.722,-24.765) 72(-144.15,-73.533) 72(-144.15,-24.765) 72(-139.578,-73.533) 72(-139.578,-24.765) 72(-134.879,-73.533) 72(-134.879,-24.765) 72(-130.307,-73.533) 72(-130.307,-24.765) 72(-125.735,-73.533) 72(-125.735,-24.765) 72(-121.163,-73.533) 72(-121.163,-24.765) 72(-116.464,-73.533) 72(-116.464,-24.765) 72(-111.892,-73.533) 72(-111.892,-24.765) 72(-107.32,-73.533) 72(-107.32,-24.765) 72(-102.748,-73.533) 72(-102.748,-24.765) 72(-98.049,-73.533) 72(-98.049,-24.765) 72(-93.477,-73.533) 72(-93.477,-24.765) 72(-88.905,-73.533) 72(-88.905,-24.765) 72(-84.333,-73.533) 72(-84.333,-24.765) 72(-79.634,-73.533) 72(-79.634,-24.765) 72(-75.062,-73.533) 72(-75.062,-24.765) 72(-70.49,-73.533) 72(-70.49,-24.765) 72(-65.918,-73.533) 72(-65.918,-24.765) 72(-61.219,-73.533) 72(-61.219,-24.765) 72(-56.647,-73.533) 72(-56.647,-24.765) 72(-51.948,-73.533) 72(-51.948,-24.765) 72(-47.376,-73.533) 72(-47.376,-24.765) 72(-42.677,-73.533) 72(-42.677,-24.765) 72(-38.105,-73.533) 72(-38.105,-24.765) 72(-33.533,-73.533) 72(-33.533,-24.765) 72(-28.961,-73.533) 72(-28.961,-24.765) 72(-24.262,-73.533) 72(-24.262,-24.765) 72(-19.69,-73.533) 72(-19.69,-24.765) 72(-15.118,-73.533) 72(-15.118,-24.765) 72(-10.546,-73.533) 72(-10.546,-24.765) 72(-5.847,-73.533) 72(-5.847,-24.765) 72(-1.275,-73.533) 72(-1.275,-24.765) 72(3.297,-73.533) 72(3.297,-24.765) 72(7.869,-73.533) 72(7.869,-24.765) 72(12.568,-73.533) 72(12.568,-24.765) 72(17.14,-73.533) 72(17.14,-24.765) 73(-273.182,-70.485) 73(-273.182,-21.717) 73(-268.61,-70.485) 73(-268.61,-21.717) 73(-263.911,-70.485) 73(-263.911,-21.717) 73(-259.339,-70.485) 73(-259.339,-21.717) 73(-254.767,-70.485) 73(-254.767,-21.717) 73(-250.195,-70.485) 73(-250.195,-21.717) 73(-245.496,-70.485) 73(-245.496,-21.717) 73(-240.924,-70.485) 73(-240.924,-21.717) 73(-236.352,-70.485) 73(-236.352,-21.717) 73(-231.78,-70.485) 73(-231.78,-21.717) 73(-227.081,-70.485) 73(-227.081,-21.717) 73(-222.509,-70.485) 73(-222.509,-21.717) 73(-217.937,-70.485) 73(-217.937,-21.717) 73(-213.365,-70.485) 73(-213.365,-21.717) 73(-208.666,-70.485) 73(-208.666,-21.717) 73(-204.094,-70.485) 73(-204.094,-21.717) 73(-199.395,-70.485) 73(-199.395,-21.717) 73(-194.823,-70.485) 73(-194.823,-21.717) 73(-190.124,-70.485) 73(-190.124,-21.717) 73(-185.552,-70.485) 73(-185.552,-21.717) 73(-180.98,-70.485) 73(-180.98,-21.717) 73(-176.408,-70.485) 73(-176.408,-21.717) 73(-171.709,-70.485) 73(-171.709,-21.717) 73(-167.137,-70.485) 73(-167.137,-21.717) 73(-162.565,-70.485) 73(-162.565,-21.717) 73(-157.993,-70.485) 73(-157.993,-21.717) 73(-153.294,-70.485) 73(-153.294,-21.717) 73(-148.722,-70.485) 73(-148.722,-21.717) 73(-144.15,-70.485) 73(-144.15,-21.717) 73(-139.578,-70.485) 73(-139.578,-21.717) 73(-134.879,-70.485) 73(-134.879,-21.717) 73(-130.307,-70.485) 73(-130.307,-21.717) 73(-125.735,-70.485) 73(-125.735,-21.717) 73(-121.163,-70.485) 73(-121.163,-21.717) 73(-116.464,-70.485) 73(-116.464,-21.717) 73(-111.892,-70.485) 73(-111.892,-21.717) 73(-107.32,-70.485) 73(-107.32,-21.717) 73(-102.748,-70.485) 73(-102.748,-21.717) 73(-98.049,-70.485) 73(-98.049,-21.717) 73(-93.477,-70.485) 73(-93.477,-21.717) 73(-88.905,-70.485) 73(-88.905,-21.717) 73(-84.333,-70.485) 73(-84.333,-21.717) 73(-79.634,-70.485) 73(-79.634,-21.717) 73(-75.062,-70.485) 73(-75.062,-21.717) 73(-70.49,-70.485) 73(-70.49,-21.717) 73(-65.918,-70.485) 73(-65.918,-21.717) 73(-61.219,-70.485) 73(-61.219,-21.717) 73(-56.647,-70.485) 73(-56.647,-21.717) 73(-51.948,-70.485) 73(-51.948,-21.717) 73(-47.376,-70.485) 73(-47.376,-21.717) 73(-42.677,-70.485) 73(-42.677,-21.717) 73(-38.105,-70.485) 73(-38.105,-21.717) 73(-33.533,-70.485) 73(-33.533,-21.717) 73(-28.961,-70.485) 73(-28.961,-21.717) 73(-24.262,-70.485) 73(-24.262,-21.717) 73(-19.69,-70.485) 73(-19.69,-21.717) 73(-15.118,-70.485) 73(-15.118,-21.717) 73(-10.546,-70.485) 73(-10.546,-21.717) 73(-5.847,-70.485) 73(-5.847,-21.717) 73(-1.275,-70.485) 73(-1.275,-21.717) 73(3.297,-70.485) 73(3.297,-21.717) 73(7.869,-70.485) 73(7.869,-21.717) 73(12.568,-70.485) 73(12.568,-21.717) 73(17.14,-70.485) 73(17.14,-21.717) 74(-273.182,-67.437) 74(-273.182,-18.669) 74(-268.61,-67.437) 74(-268.61,-18.669) 74(-263.911,-67.437) 74(-263.911,-18.669) 74(-259.339,-67.437) 74(-259.339,-18.669) 74(-254.767,-67.437) 74(-254.767,-18.669) 74(-250.195,-67.437) 74(-250.195,-18.669) 74(-245.496,-67.437) 74(-245.496,-18.669) 74(-240.924,-67.437) 74(-240.924,-18.669) 74(-236.352,-67.437) 74(-236.352,-18.669) 74(-231.78,-67.437) 74(-231.78,-18.669) 74(-227.081,-67.437) 74(-227.081,-18.669) 74(-222.509,-67.437) 74(-222.509,-18.669) 74(-217.937,-67.437) 74(-217.937,-18.669) 74(-213.365,-67.437) 74(-213.365,-18.669) 74(-208.666,-67.437) 74(-208.666,-18.669) 74(-204.094,-67.437) 74(-204.094,-18.669) 74(-199.395,-67.437) 74(-199.395,-18.669) 74(-194.823,-67.437) 74(-194.823,-18.669) 74(-190.124,-67.437) 74(-190.124,-18.669) 74(-185.552,-67.437) 74(-185.552,-18.669) 74(-180.98,-67.437) 74(-180.98,-18.669) 74(-176.408,-67.437) 74(-176.408,-18.669) 74(-171.709,-67.437) 74(-171.709,-18.669) 74(-167.137,-67.437) 74(-167.137,-18.669) 74(-162.565,-67.437) 74(-162.565,-18.669) 74(-157.993,-67.437) 74(-157.993,-18.669) 74(-153.294,-67.437) 74(-153.294,-18.669) 74(-148.722,-67.437) 74(-148.722,-18.669) 74(-144.15,-67.437) 74(-144.15,-18.669) 74(-139.578,-67.437) 74(-139.578,-18.669) 74(-134.879,-67.437) 74(-134.879,-18.669) 74(-130.307,-67.437) 74(-130.307,-18.669) 74(-125.735,-67.437) 74(-125.735,-18.669) 74(-121.163,-67.437) 74(-121.163,-18.669) 74(-116.464,-67.437) 74(-116.464,-18.669) 74(-111.892,-67.437) 74(-111.892,-18.669) 74(-107.32,-67.437) 74(-107.32,-18.669) 74(-102.748,-67.437) 74(-102.748,-18.669) 74(-98.049,-67.437) 74(-98.049,-18.669) 74(-93.477,-67.437) 74(-93.477,-18.669) 74(-88.905,-67.437) 74(-88.905,-18.669) 74(-84.333,-67.437) 74(-84.333,-18.669) 74(-79.634,-67.437) 74(-79.634,-18.669) 74(-75.062,-67.437) 74(-75.062,-18.669) 74(-70.49,-67.437) 74(-70.49,-18.669) 74(-65.918,-67.437) 74(-65.918,-18.669) 74(-61.219,-67.437) 74(-61.219,-18.669) 74(-56.647,-67.437) 74(-56.647,-18.669) 74(-51.948,-67.437) 74(-51.948,-18.669) 74(-47.376,-67.437) 74(-47.376,-18.669) 74(-42.677,-67.437) 74(-42.677,-18.669) 74(-38.105,-67.437) 74(-38.105,-18.669) 74(-33.533,-67.437) 74(-33.533,-18.669) 74(-28.961,-67.437) 74(-28.961,-18.669) 74(-24.262,-67.437) 74(-24.262,-18.669) 74(-19.69,-67.437) 74(-19.69,-18.669) 74(-15.118,-67.437) 74(-15.118,-18.669) 74(-10.546,-67.437) 74(-10.546,-18.669) 74(-5.847,-67.437) 74(-5.847,-18.669) 74(-1.275,-67.437) 74(-1.275,-18.669) 74(3.297,-67.437) 74(3.297,-18.669) 74(7.869,-67.437) 74(7.869,-18.669) 74(12.568,-67.437) 74(12.568,-18.669) 74(17.14,-67.437) 74(17.14,-18.669) 75(-273.182,-64.389) 75(-273.182,-15.621) 75(-268.61,-64.389) 75(-268.61,-15.621) 75(-263.911,-64.389) 75(-263.911,-15.621) 75(-259.339,-64.389) 75(-259.339,-15.621) 75(-254.767,-64.389) 75(-254.767,-15.621) 75(-250.195,-64.389) 75(-250.195,-15.621) 75(-245.496,-64.389) 75(-245.496,-15.621) 75(-240.924,-64.389) 75(-240.924,-15.621) 75(-236.352,-64.389) 75(-236.352,-15.621) 75(-231.78,-64.389) 75(-231.78,-15.621) 75(-227.081,-64.389) 75(-227.081,-15.621) 75(-222.509,-64.389) 75(-222.509,-15.621) 75(-217.937,-64.389) 75(-217.937,-15.621) 75(-213.365,-64.389) 75(-213.365,-15.621) 75(-208.666,-64.389) 75(-208.666,-15.621) 75(-204.094,-64.389) 75(-204.094,-15.621) 75(-199.395,-64.389) 75(-199.395,-15.621) 75(-194.823,-64.389) 75(-194.823,-15.621) 75(-190.124,-64.389) 75(-190.124,-15.621) 75(-185.552,-64.389) 75(-185.552,-15.621) 75(-180.98,-64.389) 75(-180.98,-15.621) 75(-176.408,-64.389) 75(-176.408,-15.621) 75(-171.709,-64.389) 75(-171.709,-15.621) 75(-167.137,-64.389) 75(-167.137,-15.621) 75(-162.565,-64.389) 75(-162.565,-15.621) 75(-157.993,-64.389) 75(-157.993,-15.621) 75(-153.294,-64.389) 75(-153.294,-15.621) 75(-148.722,-64.389) 75(-148.722,-15.621) 75(-144.15,-64.389) 75(-144.15,-15.621) 75(-139.578,-64.389) 75(-139.578,-15.621)